# Altium PCB voltage sensor.PcbDoc
Units mil, origin at the board's own origin, x right, y up, seen from the top; angles counter-clockwise.
Board outline 6000 x 4000 mil, 2 copper layers (Top Layer, Bottom Layer); 21 components, 18 nets, 50 pads, 4 vias.
Unrouted connection lines stored in the file: 4.
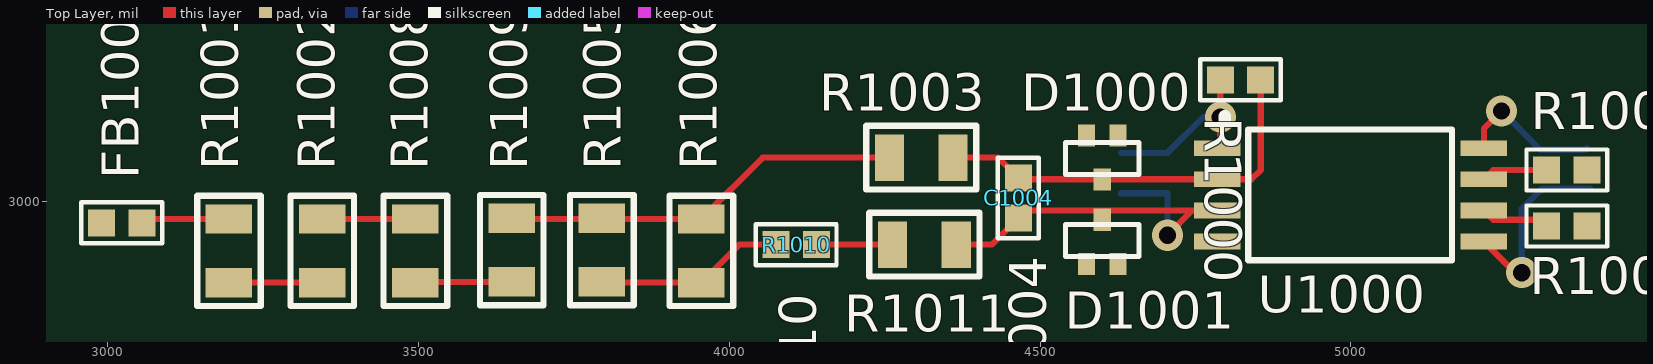
[diagram p0: Top Layer view]
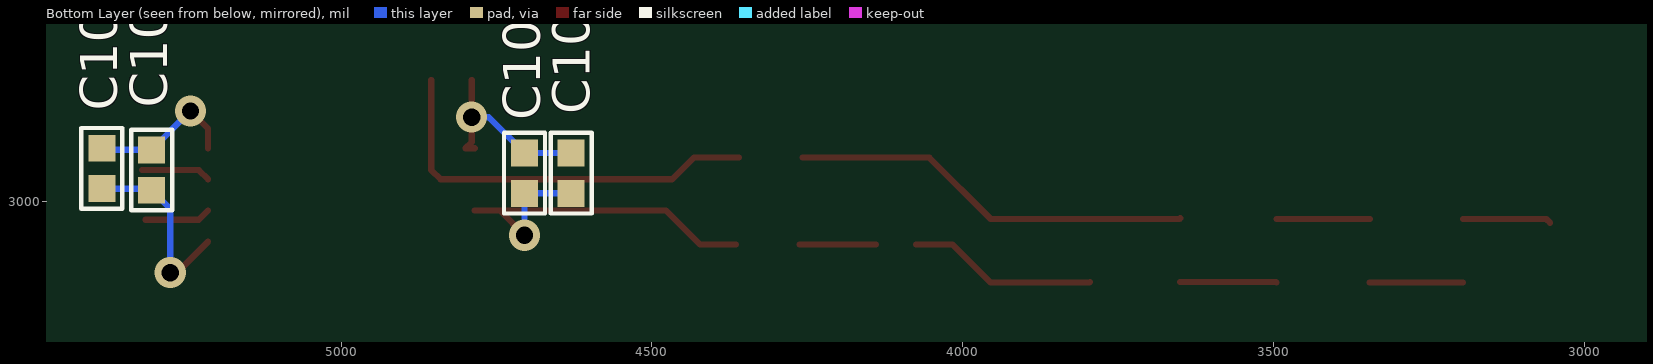
[diagram p1: Bottom Layer view, seen from below]

## Layer stack, top to bottom
Top Solder: solder mask 0.4, Solder Resist, Dk 3.5
Top Layer: signal copper 1.4
Dielectric 1: dielectric 12.6, FR-4, Dk 4.8
Bottom Layer: signal copper 1.4
Bottom Solder: solder mask 0.4, Solder Resist, Dk 3.5

## Board outline
1000,1000 7000,1000 7000,5000 1000,5000

## Design rules (kind name [scope] priority, off if disabled: settings)
Clearance [All] p1: gap=10 ignorepadtopadclearanceinfootprint=FALSE except(0: Arc-Hole Track-Hole SMDPad-Hole THPad-Hole Via-Hole Fill-Hole Poly-Hole Region-Hole Text-Hole)
PolygonConnect [All] p1: connectstyle=Relief reliefconductorwidth=10 reliefentries=4 polygonreliefangle="90 Angle" airgapwidth=10
RoutingVias [All] p1: holewidth=28 width=50 viastyle="Through Hole" minholewidth=28 minwidth=50 maxholewidth=28 maxwidth=50
SolderMaskExpansion [All] p1: expansion=4
Width [All] p1: maxlimit=10 minlimit=10 preferedwidth=10
30 further rules are at their usual default settings.

## Components (designator, comment, footprint, x,y, rotation, side; value= is the part's Value field where it differs from the comment)
C1000 "Cap 0603_new" "0603 (1608 Metric)" 4705,3045 r90 bottom value=1uF
C1001 "Cap 0603_new" "0603 (1608 Metric)" 5385,3052.52 r270 bottom value=1uF
C1002 "Cap 0603_new" "0603 (1608 Metric)" 4630,3045 r90 bottom value=0.1uF
C1003 "Cap 0603_new" "0603 (1608 Metric)" 5305,3050 r270 bottom value=0.1uF
C1004 "Cap 0603_new" "0603 (1608 Metric)" 4465,3005 r270 top value=330pF
D1000 "Diode_ESD" SOT323_ESD 4600,3031.06 r180 top value=ESD
D1001 "Diode_ESD" SOT323_ESD 4600,2973.94 r0 top value=ESD
FB1000 "Ferrite bead" "0603 (1608 Metric)" 3022.48,2965 r0 top value=1K
R1000 "NC" "0603 (1608 Metric)" 4822.48,3195.04 r180 top value=160k
R1001 "Resistor 1206" 1206 3195,2920 r270 top value=332k
R1002 "Resistor 1206" 1206 3345,2920 r90 top value=332k
R1003 "Resistor 1206" 1206 4308.82,3070 r0 top value=12R
R1004 "Resistor 0603" "0603 (1608 Metric)" 5347.52,3050 r0 top value=10R
R1005 "Resistor 1206" 1206 3795,2921.18 r90 top value=1.13k
R1006 "Resistor 1206" 1206 3955,2920 r90 top value=NC
R1007 "Resistor 0603" "0603 (1608 Metric)" 5347.52,2960 r0 top value=10R
R1008 "Resistor 1206" 1206 3495,2920 r270 top value=332k
R1009 "Resistor 1206" 1206 3650,2921.18 r90 top value=332k
R1010 "Resistor 0603" "0603 (1608 Metric)" 4107.48,2930 r180 top value=0R
R1011 "Resistor 1206" 1206 4313.82,2930 r0 top value=12R
U1000 "AMC1100" SOP8 4785,3085 r270 top

## Footprints (in the part's own frame and the unit in brackets; to place one, negate y for a bottom-side part, rotate by r counter-clockwise, add the part's x,y. Pads: shape width x height; smd on the part's side, far side on the other; paste and mask are expansions set on the pad)
"0603 (1608 Metric)" [mm]
  rect 1.1x1.1 smd: 1(-0.825,0) 2(0.825,0)
  silkscreen extent -1.65,-0.84 1.65,0.84, body extent -1.02,-0.51 1.02,0.51, height 0.5
1206 [mm] "1206\" surface mount"
  rect 1.2x1.9 smd: 1(-1.3,0) 2(1.3,0)
  silkscreen extent -2.25,-1.3 2.25,1.3, body extent -1.6,-0.72 1.6,0.73, height 1
SOP8 [mm]
  rect 0.64x1.905 smd: 1(0,0) 2(1.27,0) 3(2.54,0) 4(3.81,0) 5(3.81,10.9) 6(2.54,10.9) 7(1.27,10.9) 8(0,10.9)
  silkscreen extent -1.3,0.3 4.57,9.6
SOT323_ESD [mm]
  rect 0.7x0.9 smd: 1(-0.65,-1.9) 2(0.65,-1.9) C(0,-0.1)
  silkscreen extent -1.5,-1.6 1.5,-0.3

## Part data
C1000 C1001: "CAP CER 1UF 50V X5R 0603", part=1276-1860-1-ND
C1002 C1003: "CAP CER 0.1UF 50V Y5V 0603", part=311-1343-6-ND
C1004: "CAP CER 330PF 50V C0G 0603", part=445-7033-2-ND
FB1000: "FERRITE BEAD 1 KOHM 0603 1LN", part=445-8672-1-ND
R1000: library part "Resistor 0603", "Resistor 0603"
R1001 R1002 R1008 R1009: "RES SMD 332K OHM 0.1% 1/4W 1206", part=RG32P332KBCT-ND
R1003 R1011: "12 Ohm ±0.5% 0.25W, 1/4W Chip Resistor 1206", part=311-2961-1-ND
R1004 R1007: "RES SMD 10 OHM 0.05% 1/10W 0603", part=RNCF0603AKT10R0CT-ND
R1005: "RES SMD 1.13K OHM 0.1% 1/4W 1206", part=P1.13KBCCT-ND
D1000 D1001: part=DESD1P0RFW-7

## Via types
v1: diameter 50, hole 28, Top Layer to Bottom Layer, 4 vias

## Nets (pads, with @x,y where several pads share a name; then routed paths per layer and width w, separated by ;. In a path a pad name is that pad's centre, name@x,y a point inside that pad or via, vN(x,y) a via of type N, cw(c..) or ccw(c..) an arc to the next point about the centre after c; other vN are vias at no path point)
5V_LV: C1001.1 C1003.1 U1000.8 | length 236.2
  Top Layer w10: U1000.8 5214.13,3116.65 v1(5242.48,3145)
  Bottom Layer w10: v1(5242.48,3145) C1003.1 5377.48,3082.48 C1001.1@5380,3085
+5V_PH: C1000.2 C1002.2 D1000.1 D1001.2 R1000.2 U1000.1 | length 313
  Top Layer w10: U1000.1 4800,3085 4790,3095 v1(4790,3135) R1000.2
  Bottom Layer w10: C1002.2 C1000.2 4762.52,3135 v1(4790,3135)
-5V_PH: D1000.2 D1001.1
GND_LV: C1001.2 C1003.2 U1000.5 | length 307.6
  Top Layer w10: U1000.5 5264.13,2885 v1(5275,2885)
  Bottom Layer w10: v1(5275,2885) 5275,2987.52 C1003.2 5307.52,3020.04 C1001.2
GND_PH: C1000.1 C1002.1 C1004.2 D1001.C R1011.2 U1000.3 U1000.4 | length 641.9
  Top Layer w10: R1011.2 4422.48,2930 C1004.2 4477.48,2985 4745,2985 ; v1(4705,2945) 4745,2985 ; U1000.3 4745,2985
  Bottom Layer w10: C1002.1 C1000.1 v1(4705,2945)
N_HV: R1005.1 R1006.1 R1010.2 | length 305.8
  Top Layer w10: R1005.1 3796.18,2868.82 R1006.1 4016.18,2930 R1010.2
NetC1004_1: C1004.1 D1000.C R1000.1 R1003.2 U1000.2 | length 660.7
  Top Layer w10: R1003.2 4432.48,3070 C1004.1 4467.48,3035 D1000.C U1000.2 4840,3035 4854.96,3049.96 R1000.1
NetFB1000_1: FB1000.1
NetFB1000_2: FB1000.2 R1001.1 | length 142.6
  Top Layer w10: FB1000.2 3061.14,2971.18 R1001.1
NetR1001_2: R1001.2 R1002.1 | length 150
  Top Layer w10: R1001.2 R1002.1
NetR1002_2: R1002.2 R1008.1 | length 150
  Top Layer w10: R1002.2 R1008.1
NetR1003_1: R1003.1 R1005.2 R1006.2 R1009.2 | length 649.1
  Top Layer w10: R1009.2 3651.18,2971.18 R1006.2 4053.82,3070 R1003.1
NetR1004_1: R1004.1 U1000.7 | length 112.1
  Top Layer w10: U1000.7 5229.13,3050 R1004.1 R1004.1@5320,3050
NetR1004_2: R1004.2
NetR1007_1: R1007.1 U1000.6 | length 107.1
  Top Layer w10: U1000.6 5229.13,2970 R1007.1@5315,2970
NetR1007_2: R1007.2
NetR1008_2: R1008.2 R1009.1 | length 155.5
  Top Layer w10: R1008.2 3496.18,2870 R1009.1
NetR1010_1: R1010.1 R1011.1 | length 122.7
  Top Layer w10: R1010.1 R1011.1